# EAGLE board LED Driver Board1.0 (EAGLE 5.10)
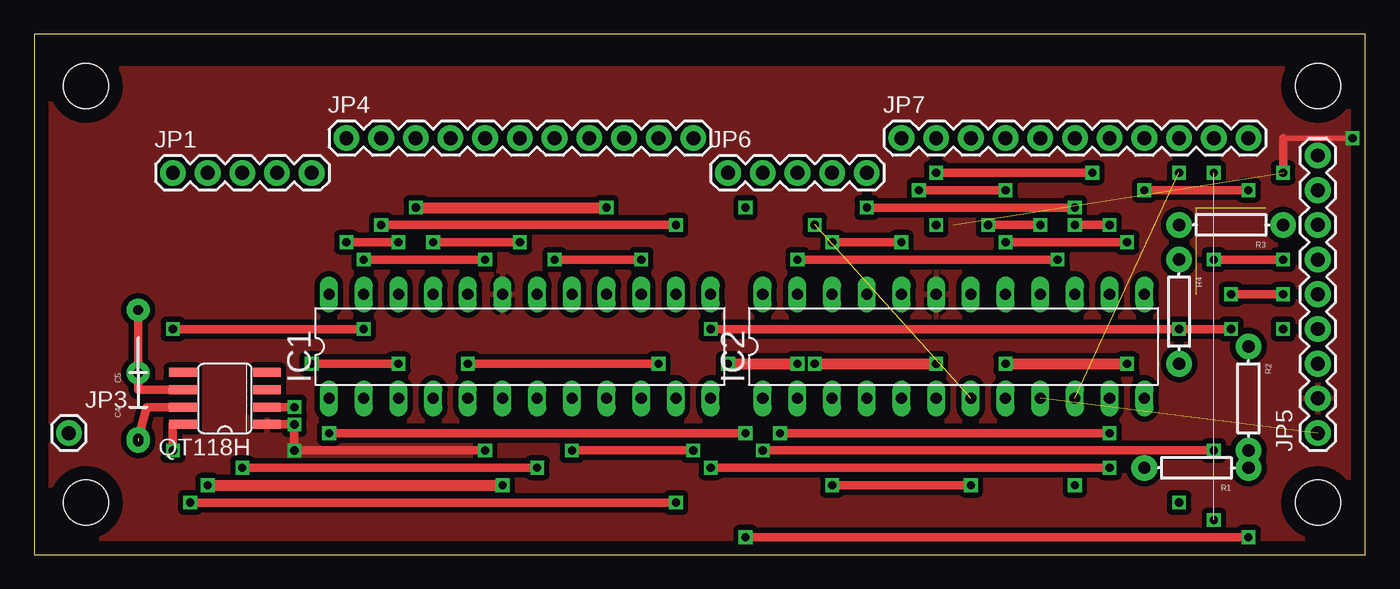
[diagram p0: board, top side]
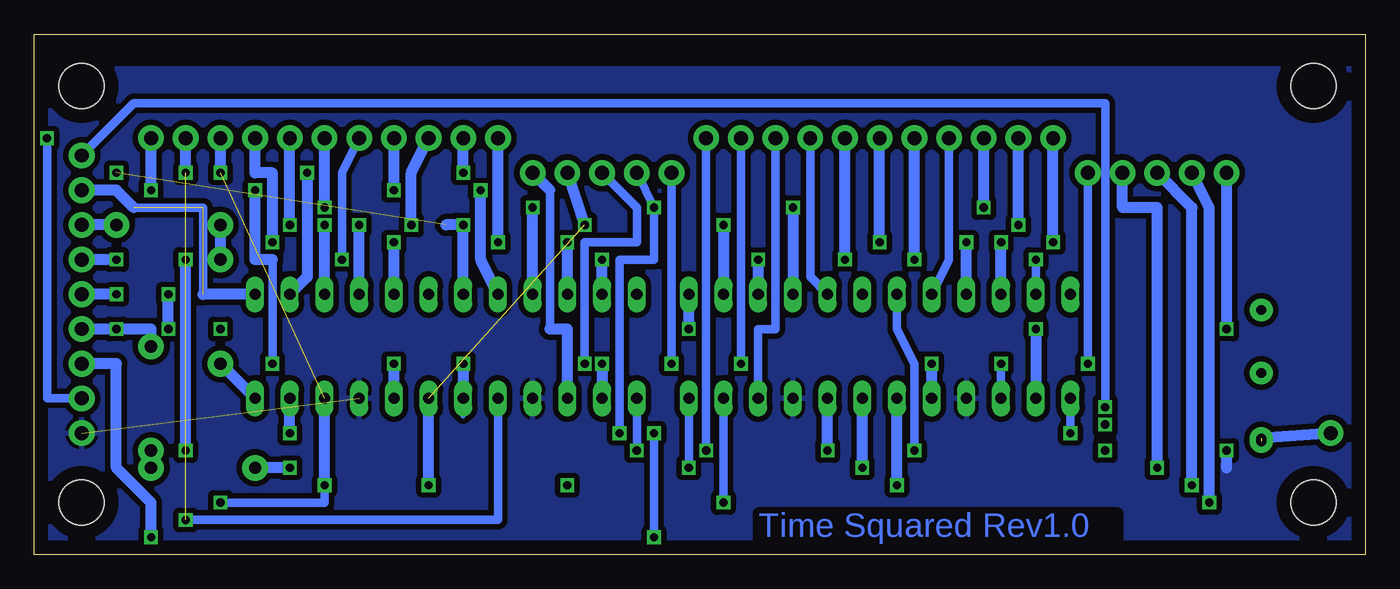
[diagram p1: board, bottom side, seen from below]

Size 97.46 x 38.09 mm. Coordinates in mm from the lower left corner, seen from the top.
Outline: 0,0 97.46,0 97.46,38.09 0,38.09 0,0
Copper layers (1*16): Top 0.035mm / dielectric 1.5mm / Bottom 0.035mm
Design rules "default": minimum track width 10mil, minimum drill 24mil, track to track 8mil, track to pad 8mil, pad to pad 8mil, via to via 8mil, smd to smd 8mil, copper to edge 40mil, drill to drill 8mil, minimum pad ring 10mil, minimum via ring 8mil, stop-mask expansion 4mil, vias tented up to drill 0mil, thermal gap 10mil

## Footprints (pad centres in the part's own frame; a part is rotated, then mirrored left to right if it is on the bottom)
CAP-PTH-5MM = drill 0.7 pad 1.651 round: 1 -2.5,0; 2 2.5,0
CAP-PTH-LARGE = drill 0.7 pad 1.651 round: 1 -4.826,0; 2 4.572,0
DIL24-3 = drill 0.813 long: 1 -13.97,-3.81; 2 -11.43,-3.81; 3 -8.89,-3.81; 4 -6.35,-3.81; 5 -3.81,-3.81; 6 -1.27,-3.81; 7 1.27,-3.81; 8 3.81,-3.81; 9 6.35,-3.81; 10 8.89,-3.81; 11 11.43,-3.81; 12 13.97,-3.81; 13 13.97,3.81; 14 11.43,3.81; 15 8.89,3.81; 16 6.35,3.81; 17 3.81,3.81; 18 1.27,3.81; 19 -1.27,3.81; 20 -3.81,3.81; 21 -6.35,3.81; 22 -8.89,3.81; 23 -11.43,3.81; 24 -13.97,3.81
1X05 = drill 1.016 pad 1.88 round: 1 0,0; 2 2.54,0; 3 5.08,0; 4 7.62,0; 5 10.16,0
1X01 = drill 1.016 pad 1.88 round: 1 0,0
1X11 = drill 1.016 pad 1.88 round: 1 0,0; 2 2.54,0; 3 5.08,0; 4 7.62,0; 5 10.16,0; 6 12.7,0; 7 15.24,0; 8 17.78,0; 9 20.32,0; 10 22.86,0; 11 25.4,0
1X09 = drill 1.016 pad 1.88 round: 1 0,0; 2 2.54,0; 3 5.08,0; 4 7.62,0; 5 10.16,0; 6 12.7,0; 7 15.24,0; 8 17.78,0; 9 20.32,0
AXIAL-0.3 = drill 0.9 pad 1.88 round: P$1 -3.81,0; P$2 3.81,0
STAND-OFF = hole 3.302: 0,0
QT118H = smd 0.66 x 2.032: 1 1.905,2.007; 2 3.175,2.007; 3 4.445,2.007; 4 5.715,2.007; 5 5.715,8.153; 6 4.445,8.153; 7 3.175,8.153; 8 1.905,8.153

## Placement (x,y rotation side)
C4  [CAP-PTH-5MM]  7.62,10.79 90 top
C5  [CAP-PTH-LARGE]  7.62,13.34 90 top
IC1  MAX7219CNG  [DIL24-3]  35.56,15.24 0 top
IC2  MAX7219CNG  [DIL24-3]  67.31,15.24 0 top
JP1  M11PTH  [1X05]  10.16,27.94 0 top
JP3  M01PTH  [1X01]  2.54,8.89 0 top
JP4  M11PTH  [1X11]  22.86,30.48 0 top
JP5  [1X09]  93.98,8.89 90 top
JP6  M11PTH  [1X05]  50.8,27.94 0 top
JP7  M11PTH  [1X11]  63.5,30.48 0 top
R1  [AXIAL-0.3]  85.09,6.35 180 top
R2  [AXIAL-0.3]  88.9,11.43 270 top
R3  [AXIAL-0.3]  87.63,24.13 180 top
R4  [AXIAL-0.3]  83.82,17.78 270 top
U$1  [STAND-OFF]  93.98,34.29 0 top
U$2  [STAND-OFF]  93.98,3.81 0 top
U$3  [STAND-OFF]  3.81,3.81 0 top
U$4  [STAND-OFF]  3.81,34.29 0 top
U$5  QT118  [QT118H]  19.05,7.62 90 top

## Library data of the parts
C4 C5 JP1 JP3-JP7 R1-R4 U$1-U$4 = _SparkFun 12:09 
IC1 IC2 = maxim
U$5 = _Spencers Library

## Nets
CLK1: IC1.13 JP5.5
CLK2: IC2.13 JP5.8
DIN1: IC1.1 JP5.3
DIN2: IC2.1 JP5.6
GND: IC1.4 IC1.9 IC2.4 IC2.9 JP5.1 U$5.8
ISET1: IC1.18
ISET2: IC2.18
LOAD1: JP5.4 R2.P$1
LOAD2: JP5.7 R3.P$1
N$1: IC1.2 JP1.1
N$2: IC1.11 JP1.2
N$3: IC1.6 JP1.3
N$4: IC1.7 JP1.4
N$5: IC1.3 JP1.5
N$6: IC1.14 JP4.2
N$7: IC1.16 JP4.3
N$8: IC1.20 JP4.4
N$9: IC1.23 JP4.5
N$10: IC1.21 JP4.6
N$11: IC1.15 JP4.7
N$12: IC1.17 JP4.8
N$13: IC1.10 JP4.9
N$14: IC1.5 JP4.10
N$15: IC1.8 JP4.11
N$16: R1.P$1 R2.P$2
N$17: JP5.9 U$5.2
N$18: C4.1 C5.1 JP3.1 U$5.7
N$19: R3.P$2 R4.P$1
N$20: C4.2 C5.2 U$5.6
N$21: IC1.12 R1.P$2
N$23: IC2.12 R4.P$2
N$24: IC2.2 JP6.1
N$25: IC2.11 JP6.2
N$26: IC2.6 JP6.3
N$27: IC2.7 JP6.4
N$28: IC2.3 JP6.5
N$29: IC2.14 JP7.2
N$30: IC2.20 JP7.4
N$31: IC2.16 JP7.3
N$32: IC2.23 JP7.5
N$33: IC2.21 JP7.6
N$34: IC2.15 JP7.7
N$35: IC2.17 JP7.8
N$36: IC2.22 JP7.1
N$37: IC1.22 JP4.1
N$38: IC2.10 JP7.9
N$39: IC2.5 JP7.10
N$40: IC2.8 JP7.11
VCC: IC1.19 IC2.19 JP5.2 U$5.1

## Tracks (layer width: path | path; a pad name or v marks a point on that pad's centre or on a via)
CLK1  (via drill 0.6)
  Top 0.61: v49.53,16.51 v83.82,16.51 v87.63,16.51 | v87.63,19.05 v91.44,19.05
  Bottom 0.813: v49.53,16.51 IC1.13 | v91.44,19.05 JP5.5 | v87.63,16.51 v87.63,19.05
CLK2  (2 unrouted)
  Bottom 0.61: 90.17,25.4 85.09,25.4 85.09,19.05
  Bottom 0.813: JP5.8 91.44,26.67 90.17,25.4 | IC2.13 85.09,19.05
DIN1  (via drill 0.6)
  Top 0.61: v21.59,8.89 v52.07,8.89 | v52.07,1.27 v88.9,1.27
  Bottom 0.61: v21.59,8.89 IC1.1 | v52.07,8.89 v52.07,1.27
  Bottom 0.813: JP5.3 91.44,13.97 91.44,6.35 88.9,3.81 v88.9,1.27
DIN2  (via drill 0.6)
  Top 0.61: v53.34,7.62 v86.36,7.62 | v86.36,21.59 v91.44,21.59
  Bottom 0.61: v53.34,7.62 IC2.1
  Bottom 0.813: v91.44,21.59 JP5.6 | v86.36,7.62 v86.36,21.59
GND  (via drill 0.6)  (1 unrouted)
  Top 0.406: 10.16,9.53 U$5.8
  Top 0.61: v10.16,7.62 10.16,9.53
  Bottom 0.813: 10.16,6.35 v10.16,7.62
  pour Bottom (isolate 0.406): 0,35.56 0,0 97.79,0 97.79,35.56
LOAD1  (via drill 0.6)
  Bottom 0.813: R2.P$1 88.9,16.51 v91.44,16.51 JP5.4
LOAD2
  Bottom 0.813: R3.P$1 JP5.7
N$1  (via drill 0.6)
  Top 0.61: v10.16,16.51 v24.13,16.51
  Bottom 0.406: IC1.2 24.13,13.97
  Bottom 0.813: v10.16,16.51 JP1.1 | v24.13,16.51 IC1.2
N$2  (via drill 0.6)
  Top 0.61: v11.43,3.81 v46.99,3.81
  Bottom 0.61: v46.99,3.81 IC1.11
  Bottom 0.813: JP1.2 11.43,25.4 v11.43,3.81
N$3  (via drill 0.6)
  Top 0.813: v12.7,5.08 v34.29,5.08
  Bottom 0.813: JP1.3 12.7,25.4 v12.7,5.08 | v34.29,5.08 IC1.6
N$4  (via drill 0.6)
  Top 0.61: v15.24,6.35 v36.83,6.35
  Bottom 0.813: JP1.4 17.78,25.4 15.24,25.4 v15.24,6.35 | v36.83,6.35 IC1.7
N$5  (via drill 0.6)
  Top 0.61: v20.32,13.97 v26.67,13.97
  Bottom 0.61: v26.67,13.97 IC1.3 | v20.32,13.97 JP1.5
N$6  (via drill 0.6)
  Top 0.61: v25.4,24.13 v46.99,24.13
  Bottom 0.813: v25.4,24.13 JP4.2 | v46.99,24.13 IC1.14
N$7  (via drill 0.6)
  Top 0.813: v27.94,25.4 v41.91,25.4
  Bottom 0.813: v27.94,25.4 JP4.3 | v41.91,25.4 IC1.16
N$8
  Bottom 0.61: IC1.20 30.48,21.59 JP4.4
N$9  (via drill 0.6)
  Top 0.61: v24.13,21.59 v33.02,21.59
  Bottom 0.61: IC1.23 v24.13,21.59
  Bottom 0.813: v33.02,21.59 JP4.5
N$10  (via drill 0.6)
  Top 0.61: v29.21,22.86 v35.56,22.86
  Bottom 0.813: IC1.21 v29.21,22.86 | v35.56,22.86 JP4.6
N$11  (via drill 0.6)
  Top 0.61: v38.1,21.59 v44.45,21.59
  Bottom 0.813: v44.45,21.59 IC1.15 | v38.1,21.59 JP4.7
N$12
  Bottom 0.61: IC1.17 40.64,20.32 JP4.8
N$13
  Bottom 0.61: IC1.10 44.45,16.51 43.18,16.51 JP4.9
N$14  (via drill 0.6)
  Top 0.61: v31.75,13.97 v45.72,13.97
  Bottom 0.61: v45.72,13.97 JP4.10
  Bottom 0.813: IC1.5 v31.75,13.97
N$15  (via drill 0.6)
  Top 0.61: v39.37,7.62 v48.26,7.62
  Bottom 0.61: v48.26,7.62 JP4.11
  Bottom 0.813: v39.37,7.62 IC1.8
N$16
  Bottom 0.813: R1.P$1 R2.P$2
N$17  (via drill 0.6)
  Top 0.61: U$5.2 v19.05,10.79
  Bottom 0.61: v19.05,10.79 19.05,33.02 90.17,33.02 JP5.9
N$18  (1 unrouted)
  Top 0.61: U$5.7 8.26,10.79 C5.1
  Bottom 0.813: JP3.1 C5.1
N$19
  Bottom 0.813: R4.P$1 R3.P$2
N$20
  Top 0.61: U$5.6 7.62,12.06 C4.2 C5.2
N$21  (via drill 0.6)
  Top 0.61: v49.53,6.35 v78.74,6.35
  Bottom 0.61: v49.53,6.35 IC1.12
  Bottom 0.813: v78.74,6.35 R1.P$2
N$22  (via drill 0.6)
  other vias: 21.59,8.89
N$23
  Bottom 0.813: IC2.12 R4.P$2
N$24  (via drill 0.6)
  Top 0.813: v50.8,13.97 v55.88,13.97
  Bottom 0.61: v50.8,13.97 JP6.1
  Bottom 0.813: v55.88,13.97 IC2.2
N$25  (via drill 0.6)
  Top 0.61: v54.61,8.89 v78.74,8.89
  Bottom 0.61: v54.61,8.89 54.61,21.59 52.07,21.59 52.07,25.4 JP6.2
  Bottom 0.813: v78.74,8.89 IC2.11
N$26  (via drill 0.6)
  Top 0.813: v57.15,13.97 v66.04,13.97
  Bottom 0.406: IC2.6 66.04,10.16
  Bottom 0.61: v57.15,13.97 57.15,22.86 53.34,22.86 53.34,25.4 JP6.3
  Bottom 0.813: v66.04,13.97 IC2.6
N$27  (via drill 0.6)  (1 unrouted)
  Top 0.61: 58.42,5.08 v68.58,5.08
  Bottom 0.813: v68.58,5.08 IC2.7 | 57.15,24.13 JP6.4
N$28
  Bottom 0.61: 59.69,16.51 59.69,26.67
  Bottom 0.813: IC2.3 58.42,16.51 59.69,16.51 | 59.69,26.67 JP6.5
N$29  (via drill 0.6)
  Top 0.61: v66.04,27.94 v77.47,27.94
  Bottom 0.813: v66.04,27.94 JP7.2 | v77.47,27.94 77.47,20.32 IC2.14
N$30  (via drill 0.6)
  Top 0.61: v64.77,26.67 v71.12,26.67
  Bottom 0.813: v71.12,26.67 JP7.4 | IC2.20 64.77,21.59 v64.77,26.67
N$31  (via drill 0.6)
  Top 0.61: v73.66,24.13 v69.85,24.13
  Bottom 0.813: IC2.16 v73.66,24.13 | v69.85,24.13 69.85,27.94 JP7.3
N$32  (via drill 0.6)
  Top 0.61: v55.88,21.59 v74.93,21.59
  Bottom 0.61: v74.93,21.59 74.93,27.94 JP7.5
  Bottom 0.813: IC2.23 v55.88,21.59
N$33  (via drill 0.6)
  Top 0.61: v60.96,25.4 v76.2,25.4
  Bottom 0.813: IC2.21 v60.96,25.4 | v76.2,25.4 JP7.6
N$34  (via drill 0.6)
  Top 0.61: v76.2,24.13 v78.74,24.13
  Bottom 0.813: IC2.15 v76.2,24.13 | v78.74,24.13 JP7.7
N$35  (via drill 0.6)
  Top 0.61: v71.12,22.86 v80.01,22.86
  Bottom 0.813: JP7.8 81.28,27.94 80.01,27.94 v80.01,22.86 | IC2.17 v71.12,22.86
N$36  (via drill 0.6)
  Top 0.61: v58.42,22.86 v63.5,22.86
  Bottom 0.813: IC2.22 v58.42,22.86 | v63.5,22.86 JP7.1
N$37  (via drill 0.6)
  Top 0.61: v26.67,22.86 v22.86,22.86
  Bottom 0.813: IC1.22 v26.67,22.86 | v22.86,22.86 JP4.1
N$38  (via drill 0.6)  (1 unrouted)
  Bottom 0.61: v76.2,5.08 76.2,3.81 v83.82,3.81
  Bottom 0.813: v83.82,27.94 JP7.9 | v76.2,5.08 IC2.10
N$39  (via drill 0.6)  (1 unrouted)
  Bottom 0.61: IC2.5 63.5,2.54 v86.36,2.54
  Bottom 0.813: v86.36,27.94 JP7.10
N$40  (via drill 0.6)
  Top 0.61: v81.28,26.67 v88.9,26.67
  Top 0.813: v71.12,13.97 v80.01,13.97
  Bottom 0.61: v80.01,13.97 80.01,21.59
  Bottom 0.813: v88.9,26.67 JP7.11 | v81.28,26.67 81.28,21.59 80.01,21.59 | IC2.8 v71.12,13.97
N$41  (via drill 0.6)
  other vias: 49.53,6.35
N$42  (via drill 0.6)
  other vias: 78.74,6.35
N$43  (via drill 0.6)
  other vias: 52.07,25.4
N$44  (via drill 0.6)
  other vias: 66.04,24.13
N$45  (via drill 0.6)
  other vias: 91.44,27.94
N$46  (via drill 0.6)
  other vias: 10.16,7.62
N$47  (via drill 0.6)
  other vias: 57.15,24.13
N$49  (via drill 0.6)
  other vias: 46.99,3.81
N$51  (via drill 0.6)
  other vias: 58.42,5.08
N$52  (via drill 0.6)
  other vias: 19.05,10.79
N$53  (via drill 0.6)
  other vias: 24.13,21.59
N$55  (via drill 0.6)
  other vias: 19.05,9.53
N$56  (via drill 0.6)
  other vias: 33.02,7.62
VCC  (via drill 0.6)  (1 unrouted)
  Top 0.406: v96.52,30.48 91.44,30.48
  Top 0.61: U$5.1 19.05,9.53 v19.05,7.62 v33.02,7.62 | 91.44,30.48 91.44,27.94
  Bottom 0.61: IC1.19 34.29,16.51 33.02,13.97 v33.02,7.62 | JP5.2 96.52,11.43 v96.52,30.48
  Bottom 0.813: IC2.19 66.04,24.13 67.31,24.13
  pour Top (isolate 0.406): 0,35.56 0,0 97.79,0 97.79,1.27 97.79,35.56

## Text on the board
Bottom: Time Squared Rev1.0